# Altium PCB PCB_2021-06-02.pcbdoc
Units mil, origin at the board's own origin, x right, y up, seen from the top; angles counter-clockwise.
Board outline 4035 x 2060 mil, 2 copper layers (Top Layer, Bottom Layer); 28 components, 21 nets, 103 pads, 25 vias.
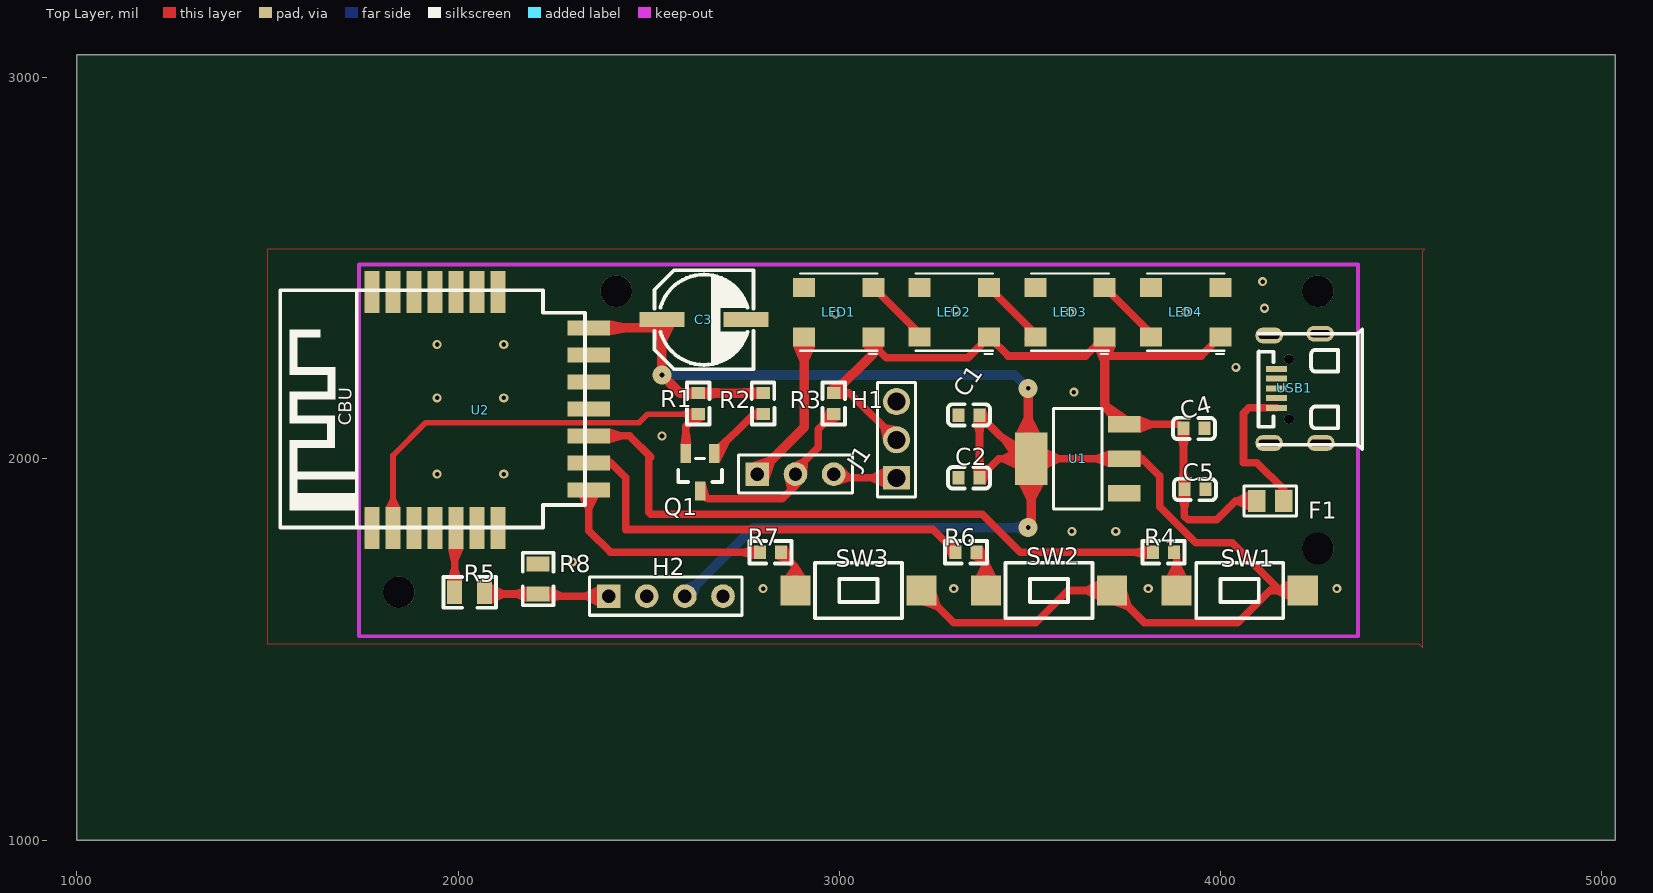
[diagram p0: Top Layer view]
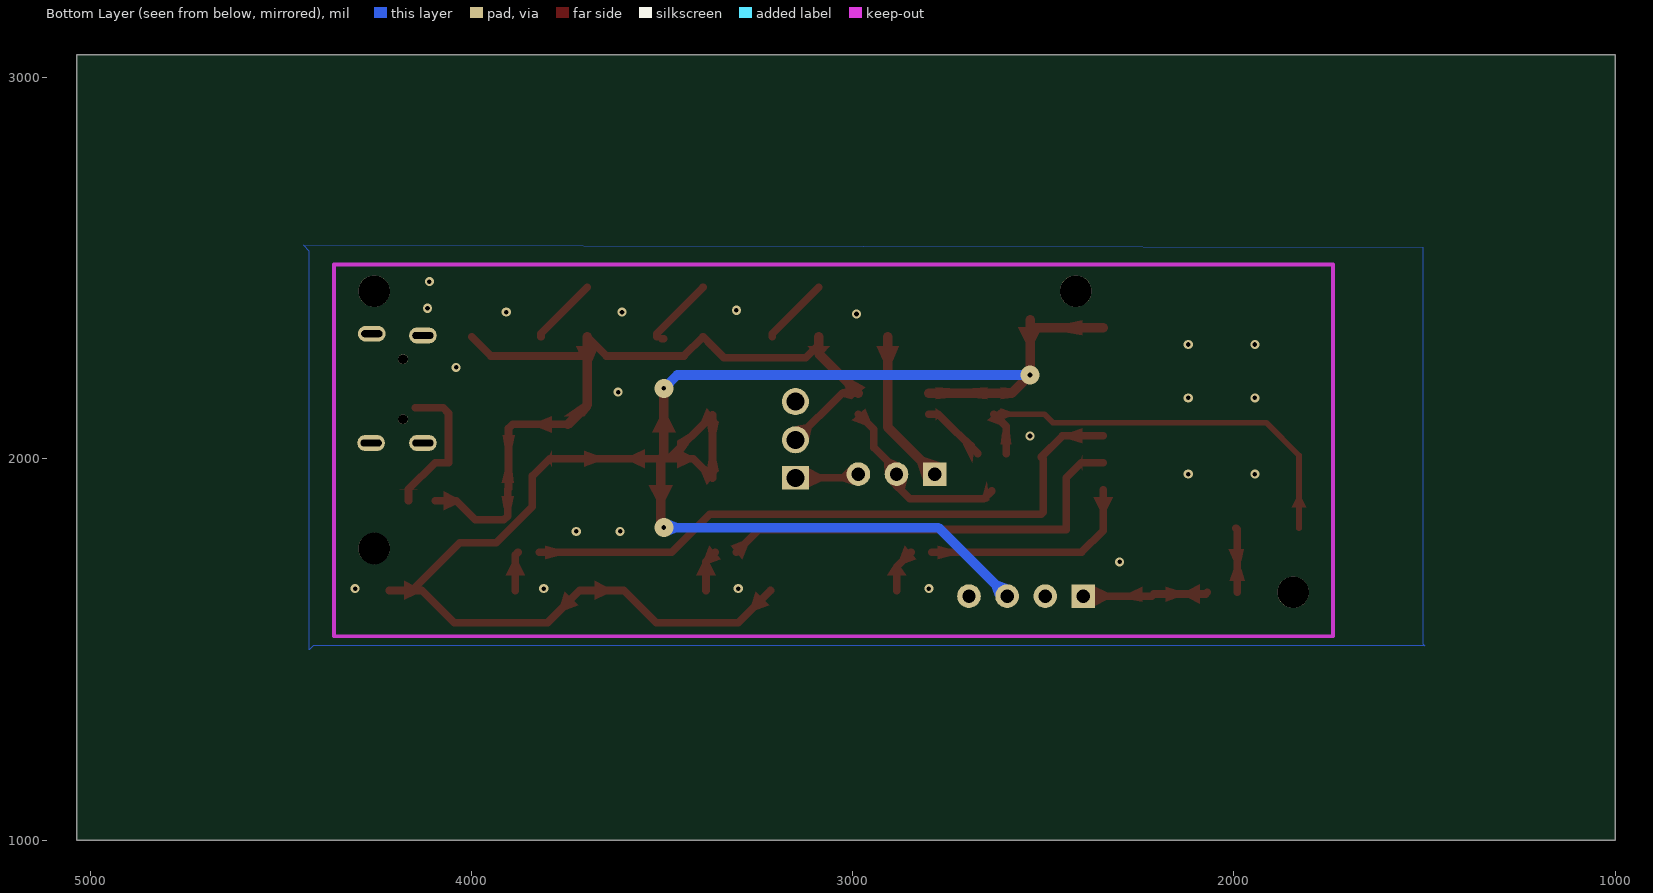
[diagram p1: Bottom Layer view, seen from below]

## Layer stack, top to bottom
Top Layer: signal copper (thickness not stored)
Dielectric: dielectric 12.6, FR-4, Dk 4.8
Bottom Layer: signal copper (thickness not stored)

## Board outline
5035,1000 1000,1000 1000,3060 5035,3060

## Components (designator, comment, footprint, x,y, rotation, side; value= is the part's Value field where it differs from the comment)
C1 "226" C0603 3340,2115 r0 top
C2 "104" C0603 3340,1950 r0 top
C3 "100uF/25V" CAP-SMD_BD6.3-L6.6-W6.6-FD 2645,2365 r0 top
C4 "104" C0603 3930,2080 r180 top
C5 "106" C0603 3932.55,1920 r180 top
F1 "0.5A/6V" 0805_L_JX 4130,1890 r180 top
H1 "Header-Male-2.54_1x3" HDR-TH_3P-P2.54-V 3150,2050.16 r90 top
H2 "HDR-F-2.54_1x4" HDR-F-2.54_1X4 2545,1640 r0 top
J1 "HDR-M-2.54_1x3" HDR-M-2.54_1X3 2885,1960 r0 top
LED1 "WS2812E" LED-SMD_4P-L5.0-W5.0-BR 2998.31,2385 r0 top
LED2 "WS2812E" LED-SMD_4P-L5.0-W5.0-BR 3301.62,2385 r0 top
LED3 "WS2812E" LED-SMD_4P-L5.0-W5.0-BR 3605,2385 r0 top
LED4 "WS2812E" LED-SMD_4P-L5.0-W5.0-BR 3908.31,2385 r0 top
Q1 "WST3400S" SOT-23-3_L2.9-W1.6-P1.90-LS2.8-BR 2635,1965 r90 top
R1 "10K" R0603 2630,2145 r270 top
R2 "10K" R0603 2800,2145 r270 top
R3 "10K" R0603 2985,2145 r270 top
R4 "470" R0603 3850,1755 r180 top
R5 "229k" R0805 2030.63,1650 r180 top
R6 "470" R0603 3332.5,1755 r180 top
R7 "470" R0603 2819.65,1755 r180 top
R8 "100k" R0805 2210,1685 r270 top
SW1 "1TS002E-2500-2500" KEY-SMD_L6.1-W3.7-LS8.0 4050,1655 r0 top
SW2 "1TS002E-2500-2500" KEY-SMD_L6.1-W3.7-LS8.0 3550,1655 r0 top
SW3 "1TS002E-2500-2500" KEY-SMD_L6.1-W3.7-LS8.0 3050,1655 r0 top
U1 "AMS1117-5.0" SOT-223_L6.5-W3.5-P2.30-LS7.0-BR 3625,2000 r0 top
U2 "CBU Wi-Fi&Bluetooth 模组" "CBU WIFI&BLUETOOTH" 2342.88,2131.26 r90 top
USB1 "U254-051N-4BH806" MICRO-USB-SMD_U254-051N-4BH806 4195,2185 r90 top

## Footprints (in the part's own frame and the unit in brackets; to place one, negate y for a bottom-side part, rotate by r counter-clockwise, add the part's x,y. Pads: shape width x height; smd on the part's side, far side on the other; paste and mask are expansions set on the pad)
0805_L_JX [mil]
  rect 45.67x57.87 smd: 1(-35,0) 2(35,0)
  silkscreen extent -69,-39 69,39
C0603 [mm]
  rect 0.8x0.9 smd: 1(-0.7,0) 2(0.7,0)
  silkscreen extent -1.4,-0.7 1.4,0.72
CAP-SMD_BD6.3-L6.6-W6.6-FD [mm]
  rect 3x1 smd: 1(-2.8,0) 2(2.8,0)
  silkscreen extent -3.3,-3.3 3.3,3.3
"CBU WIFI&BLUETOOTH" [mm]
  rect 2.8x1 smd: 1(-7.947,14.446) 2(-7.947,13.046) 3(-7.947,11.646) 4(-7.947,10.246) 5(-7.947,8.846) 6(-7.947,7.446) 7(-7.947,6.046) 15(7.773,6.046) 16(7.773,7.446) 17(7.773,8.846) 18(7.773,10.246) 19(7.773,11.646) 20(7.773,13.046) 21(7.773,14.446)
  rect 1x2.8 smd: 8(-5.4,0) 9(-3.6,0) 10(-1.8,0) 11(0,0) 12(1.8,0) 13(3.6,0) 14(5.4,0)
  silkscreen extent -7.9,0.25 7.9,20.55
HDR-F-2.54_1X4 [mil]
  rect 62x62 hole 35: 1(-150,0)
  round 62 hole 35: 2(-50,0) 3(50,0) 4(150,0)
  silkscreen extent -200,-50 200,50
HDR-M-2.54_1X3 [mil]
  rect 62x62 hole 35: 1(-100,0)
  round 62 hole 35: 2(0,0) 3(100,0)
  silkscreen extent -150,-50 150,50
HDR-TH_3P-P2.54-V [mm]
  rect 1.575x1.8 hole 1.2: 1(-2.54,0)
  round 1.8 hole 1.2: 2(0,0) 3(2.54,0)
  silkscreen extent -3.81,-1.27 3.81,1.27
KEY-SMD_L6.1-W3.7-LS8.0 [mm]
  rect 2x2 smd: 1(-4.2,0) 2(4.2,0)
  silkscreen extent -2.9,-1.85 2.9,1.85
LED-SMD_4P-L5.0-W5.0-BR [mm]
  rect 1.465x1.26 smd: 1(2.307,-1.65) 2(2.307,1.65) 3(-2.307,1.65) 4(-2.307,-1.65)
  silkscreen extent -2.58,-2.79 2.58,2.58
MICRO-USB-SMD_U254-051N-4BH806 [mm]
  rect 0.4x1.4 smd: 1(-1.3,1.225) 2(-0.65,1.225) 3(0,1.225) 4(0.65,1.225) 5(1.3,1.225)
  oval 1.05x1.85 hole 0.45 slot 1.4 at 90 deg: 6(-3.64,1.725) 7(-3.64,-1.725) 8(3.52,1.725) 9(3.64,-1.675)
  round 0.65 hole 0.65 unplated: ""(-2.06,0.405) ""(1.94,0.405)
  silkscreen extent -4.06,-4.48 3.94,2.42
R0603 [mm]
  rect 0.8x0.9 smd: 1(-0.7,0) 2(0.7,0)
  silkscreen extent -1.4,-0.75 1.4,0.76
R0805 [mm]
  rect 1x1.55 smd: 1(-1,0) 2(1,0)
  silkscreen extent -1.75,-1.02 1.75,1.02
SOT-23-3_L2.9-W1.6-P1.90-LS2.8-BR [mm]
  rect 1.25x0.7 smd: 1(1.25,-0.95) 2(1.25,0.95) 3(-1.25,0)
  silkscreen extent -0.65,-1.46 0.9,1.46
SOT-223_L6.5-W3.5-P2.30-LS7.0-BR [mil]
  rect 85x43 smd: 1(122,-90.5) 2(122,0.5) 3(122,90.5)
  rect 85x138 smd: 4(-122,0.5)
  silkscreen extent -64,-132 64,132

## Free pads (board coordinates)
  round 82.68 hole 82.68 unplated: ""(1845,1650) ""(2415,2440) ""(4255,1765) ""(4255,2440)

## Via types
v1: diameter 24, hole 12, Top Layer to Bottom Layer, 22 vias
v2: diameter 50, hole 12, Top Layer to Bottom Layer, 3 vias

## Nets (pads, with @x,y where several pads share a name; then routed paths per layer and width w, separated by ;. In a path a pad name is that pad's centre, name@x,y a point inside that pad or via, vN(x,y) a via of type N, cw(c..) or ccw(c..) an arc to the next point about the centre after c; other vN are vias at no path point)
3.3V: C1.2 C2.2 C3.1 H2.3 R1.1 R2.1 SW1.2 SW2.2 SW3.2 U1.2 U1.4 U2.14 | length 5510.8
  Top Layer w20: SW3.2 3300.4,1570 3515,1570 3600,1655 SW2.2 3800.3,1570 4045,1570 4130,1655 SW1.2 4155,1655 4030,1780 3935,1780 3840,1875 3840,1955 3794.5,2000.5 U1.2 U1.4 ; U1.4 3482.1,2000.5 C1.2 C2.2 3418.1,2000.5 U1.4
  Top Layer w25: U2.14 2534.8,2343.9 C3.1 2534.8,2220.2 v2(2535,2220) 2582.4,2172.6 R1.1 R2.1 ; v2(3495,1820) 3503,1828 U1.4 3495,2008.5 v2(3495,2185)
  Bottom Layer w25: v2(2535,2220) 3460,2220 v2(3495,2185) ; H2.3 2775,1820 v2(3495,1820)
+5V: C4.2 C5.2 F1.2 H1.2 LED1.1 LED2.1 LED3.1 LED4.1 R3.1 U1.3 | length 2372.5
  Top Layer w20: R3.1 3027.6,2172.6 H1.2 ; LED1.1 3089.16,2299.15 3123.31,2265 3337.42,2265 LED2.1 ; LED2.1@3368.31,2295.88 LED2.1 ; U1.3 3891.9,2090.5 C4.2 ; C4.2@3902.5,2080 3902.5,1922.5 C5.2 3905,1850 3915,1840 3990,1840 4040,1890 F1.2 ; LED4.1 3949.12,2270 3703.31,2270 3695.85,2277.46 3695.85,2320.04 3645.81,2270 3442.51,2270 LED2.1
  Top Layer w25: R3.1 3089.2,2276.7 LED1.1 ; LED3.1 3695.8,2141.7 U1.3
ADC: R5.2 U2.5 | length 169.7
  Top Layer w20: R5.2 1991.3,1815 U2.5
ADC_IN: H2.1 R5.1 R8.2 | length 329.1
  Top Layer w20: R5.1 2074.4,1645.6 R8.2 2215.6,1640 H2.1
F1_1: F1.1 USB1.1 | length 386.5
  Top Layer w20: USB1.1 4073.8,2133.8 4060,2120 4060,1990 4095,1990 4165,1920 F1.1
GND: C1.1 C2.1 C3.2 C4.1 C5.1 H1.3 H2.2 LED1.3 LED2.3 LED3.3 LED4.3 R8.1 U1.1 U2.13 USB1.5
  other v1: 2800,1660 3300,1660 3810,1660 4305,1660 2300,1730 3610,1810 3725,1810 1945,1960 2120,1960 1945,2160 2120,2160 3615,2175 4040,2240 1945,2300 2120,2300 2990,2380 3605,2385 3908.31,2385 3305,2390 4115,2395 4110,2465
H1_1: H1.1 J1.3 | length 169.1
  Top Layer w20: J1.3 2994.8,1950.2 H1.1
LED1_4: J1.1 LED1.4 | length 410.7
  Top Layer w25: J1.1 2907.5,2082.5 LED1.4
LED2_4: LED1.2 LED2.4 | length 180.3
  Top Layer w20: LED1.2 3210.76,2328.35 LED2.4
LED3_4: LED2.2 LED3.4 | length 185.4
  Top Layer w20: LED2.2 3514.15,2328.28 LED3.4@3514.15,2320.04 ; LED3.4@3495.71,2315 LED3.4@3500.81,2315
LED4_4: LED3.2 LED4.4 | length 180.3
  Top Layer w20: LED3.2@3695.85,2449.96 3817.46,2328.35 LED4.4
P6: R4.2 U2.10 | length 1698
  Top Layer w20: U2.10 2449.6,2060.4 2505,2005 2500,2000 2500,1860 2505,1855 3375,1855 3475,1755 R4.2
P7: R6.2 U2.9 | length 1138.2
  Top Layer w20: U2.9 2400.5,1989.5 2440,1950 2440,1815 3244.9,1815 R6.2
P8: R7.2 U2.8 | length 579.5
  Top Layer w20: U2.8 2342.9,1812.1 2400,1755 R7.2
P16: Q1.2 R1.2 U2.2 | length 1153
  Top Layer w15: U2.2 1829.3,2009.3 1915,2095 2475,2095 2497.4,2117.4 R1.2
  Top Layer w20: Q1.2 2597.6,2085 R1.2
Q1_1: Q1.1 R2.2 | length 170.3
  Top Layer w20: Q1.1 2775.6,2117.4 R2.2
Q1_3: J1.2 Q1.3 R3.2 | length 502
  Top Layer w20: Q1.3 2655.8,1895 2850,1895 2885,1930 J1.2 2885,1970 2945,2030 2945,2077.44 R3.2
R6_1: R6.1 SW2.1 | length 110.1
  Top Layer w20: R6.1 3384.6,1730.4 SW2.1
S$68: 
SW1_1: R4.1 SW1.1 | length 102.9
  Top Layer w20: R4.1 3884.6,1747.9 SW1.1
SW3_1: R7.1 SW3.1 | length 115.5
  Top Layer w20: R7.1 2884.6,1717.6 SW3.1
pads on no net: H2.4 LED4.2 U2.1 U2.3 U2.4 U2.6 U2.7 U2.11 U2.12 U2.15 U2.16 U2.17 U2.18 U2.19 U2.20 U2.21 USB1. USB1.2 USB1.3 USB1.4 USB1.6 USB1.7 USB1.8 USB1.9
copper on no net:
  other v1: 2535,2060

## Polygon pours and split planes (outlines as drawn)
GND on Top Layer (solid): 1500,2550 1500,1515 4520,1515 4530,1505 4530,2545 4535,2550
GND on Bottom Layer (solid): 1505,2555 1505,1515 1500,1510 4415,1510 4425,1500 4425,2545 4440,2560

## Other copper
Top Layer:
  region net F1_1: 4142.17,1918.94 4187.83,1918.94 4175,1920 4155,1920
  region net +5V: 4072.17,1865 4072.17,1915 4042.17,1900 4042.17,1880
  region net +5V: 3920.74,1902.28 3889.25,1902.28 3895,1872.28 3915,1872.28
  region net +5V: 3918.2,2062.3 3886.7,2062.3 3892.45,2032.3 3912.45,2032.3
  region net +5V: 3889.25,1937.72 3920.74,1937.72 3912.45,1967.72 3892.45,1967.72
  region net +5V: 3789.5,2112 3789.5,2069 3819.5,2080.5 3819.5,2100.5
  region net P8: 2367.88,1898.97 2317.88,1898.97 2332.88,1868.97 2352.88,1868.97
  region net P8: 2776.34,1737.28 2776.34,1772.72 2746.34,1765 2746.34,1745
  region net P7: 2398,2009.21 2398,1969.84 2400.47,1979.53 2400.47,1999.53
  region net P7: 3289.19,1737.28 3319.32,1772.72 3289.78,1784.29 3276.79,1769.01
  region net P6: 2398,2080.08 2398,2040.71 2428,2050.39 2428,2070.39
  region net P6: 3806.69,1737.28 3806.69,1772.72 3776.69,1765 3776.69,1745
  region net ADC: 1971.57,1680.51 2010.94,1680.51 2001.26,1710.51 1981.26,1710.51
  region net ADC: 2014.3,1763.27 1974.93,1763.27 1981.26,1733.27 2001.26,1733.27
  region net ADC_IN: 2179.49,1625.94 2179.49,1665.31 2149.49,1655.63 2149.49,1635.63
  region net ADC_IN: 2089.69,1670.63 2089.69,1620.63 2119.69,1635.63 2119.69,1655.63
  region net SW3_1: 2859.65,1694.37 2909.65,1694.37 2894.65,1717.56 2874.65,1717.56
  region net SW3_1: 2862.96,1772.72 2832.8,1737.28 2862.35,1725.71 2875.35,1740.99
  region net R6_1: 3359.65,1694.37 3409.65,1694.37 3394.65,1724.37 3374.65,1724.37
  region net R6_1: 3375.81,1772.72 3345.66,1737.28 3375.2,1725.71 3388.2,1740.99
  region net SW1_1: 3859.65,1694.37 3909.65,1694.37 3894.65,1724.37 3874.65,1724.37
  region net 3.3V: 3254.72,1650.99 3219.37,1615.63 3251.19,1605.02 3265.33,1619.17
  region net 3.3V: 3675.98,1630 3675.98,1680 3645.98,1665 3645.98,1645
  region net 3.3V: 3754.72,1650.99 3719.36,1615.63 3751.18,1605.02 3765.32,1619.17
  region net 3.3V: 4175.98,1630 4175.98,1680 4145.98,1665 4145.98,1645
  region net 3.3V: 3351.81,1967.72 3383.31,1967.72 3377.55,1997.72 3357.55,1997.72
  region net 3.3V: 3383.31,2097.28 3351.81,2097.28 3357.55,2067.28 3377.55,2067.28
  region net 3.3V: 3460.5,1975.5 3460.5,2025.5 3430.5,2010.5 3430.5,1990.5
  region net 3.3V: 3353.15,1967.72 3383.31,1932.28 3395.7,1964.01 3382.7,1979.29
  region net 3.3V: 3460.5,1997.06 3460.5,2047.06 3430.5,2066.2 3430.5,2037.91
  region net 3.3V: 3383.31,2132.72 3353.15,2097.28 3382.7,2085.71 3395.7,2100.99
  region net 3.3V: 3545.5,2025.5 3545.5,1975.5 3575.5,1990.5 3575.5,2010.5
  region net 3.3V: 3704.5,1979 3704.5,2022 3674.5,2010.5 3674.5,1990.5
  region net Q1_3: 2648.8,1940.4 2642.16,1891.2 2648.73,1887.93 2657.48,1907.46
  region net Q1_3: 2902.23,1934.23 2857.28,1946.13 2863.02,1922.16 2885.38,1916.24
  region net Q1_1: 2782.29,2101.69 2782.29,2133.19 2775.63,2127.44 2775.63,2107.44
  region net Q1_1: 2679.6,2038.81 2686.18,1989.59 2710.02,2037.68 2706.68,2062.62
  region net P16: 2583.82,2038.81 2611.38,2038.81 2607.6,2068.81 2587.6,2068.81
  region net P16: 2647.71,2101.69 2612.29,2131.83 2600.71,2102.29 2615.99,2089.29
  region net Q1_3: 3002.7,2101.74 2967.3,2131.79 2955.7,2102.28 2971,2089.3
  region net Q1_3: 2915.83,1963.27 2877.9,1990.18 2901.15,2000.29 2917.69,1988.55
  region net H1_1: 3114.57,1925.16 3114.57,1975.16 3084.57,1960.16 3084.57,1940.16
  region net H1_1: 3010.36,1977.83 2999.52,1932.61 3023.64,1940.16 3028.44,1960.16
  region net +5V: 3114.64,2047.94 3152.22,2085.52 3122.96,2091.34 3108.82,2077.2
  region net +5V: 3002.71,2188.31 3002.71,2156.81 3027.6,2162.56 3027.6,2182.56
  region net 3.3V: 3789.5,2022 3789.5,1979 3794.5,1990.5 3794.5,2010.5
  region net 3.3V: 4175.98,1630 4175.98,1680 4155,1665 4155,1645
  region net P16: 1810.51,1873.5 1848.01,1873.5 1836.76,1896 1821.76,1896
  region net P16: 2612.29,2101.69 2612.29,2133.19 2589.79,2124.94 2589.79,2109.94
  region net 3.3V: 3534.25,1931.5 3471.75,1931.5 3490.5,1894 3515.5,1894
  region net 3.3V: 3463.75,2069.5 3526.25,2069.5 3507.5,2107 3482.5,2107
  region net 3.3V: 2782.3,2156.8 2782.3,2188.3 2744.8,2185.06 2744.8,2160.06
  region net 3.3V: 2647.7,2188.3 2647.7,2156.8 2685.2,2160.06 2685.2,2185.06
  region net 3.3V: 2566.01,2345.3 2503.51,2345.3 2522.26,2307.8 2547.26,2307.8
  region net 3.3V: 2612.3,2156.8 2612.3,2188.3 2582.45,2185.06 2582.45,2160.06
  region net +5V: 3724.71,2295.2 3667.01,2295.2 3683.35,2257.7 3708.35,2257.7
  region net +5V: 3704.5,2112 3756.75,2112 3713.53,2141.65 3687.01,2132.81
  region net +5V: 3118.01,2295.2 3060.31,2295.2 3076.66,2276.71 3101.66,2276.71
  region net +5V: 2967.29,2188.31 3002.71,2156.81 3020.92,2190.8 3002.21,2207.44
  region net LED1_4: 2771.81,1991 2816,1946.81 2829.26,1986.58 2811.58,2004.26
  region net LED1_4: 2936.31,2295.2 2878.61,2295.2 2894.96,2257.7 2919.96,2257.7
  region net 3.3V: 2398,2363.54 2398,2324.17 2435.5,2331.35 2435.5,2356.35
  region net 3.3V: 2566.01,2345.3 2503.51,2345.3 2522.26,2343.85 2547.26,2343.85
  region net ADC_IN: 2364,1615 2364,1665 2334,1650 2334,1630
  region net ADC_IN: 2240.51,1665 2240.51,1625.94 2270.51,1630 2270.51,1650
Bottom Layer:
  region net 3.3V: 2593.06,1670.94 2625.94,1638.06 2633.68,1661 2616,1678.68
  region net 3.3V: 3478.46,1801.25 3478.46,1838.75 3460.96,1832.5 3460.96,1807.5

## Text inside footprints (layer, text, board x,y; h text height)
U2: Top Overlay "CBU" at 1731.81,2087.48 h59.05 r89